# EAGLE board Broot (EAGLE 6.6.0)
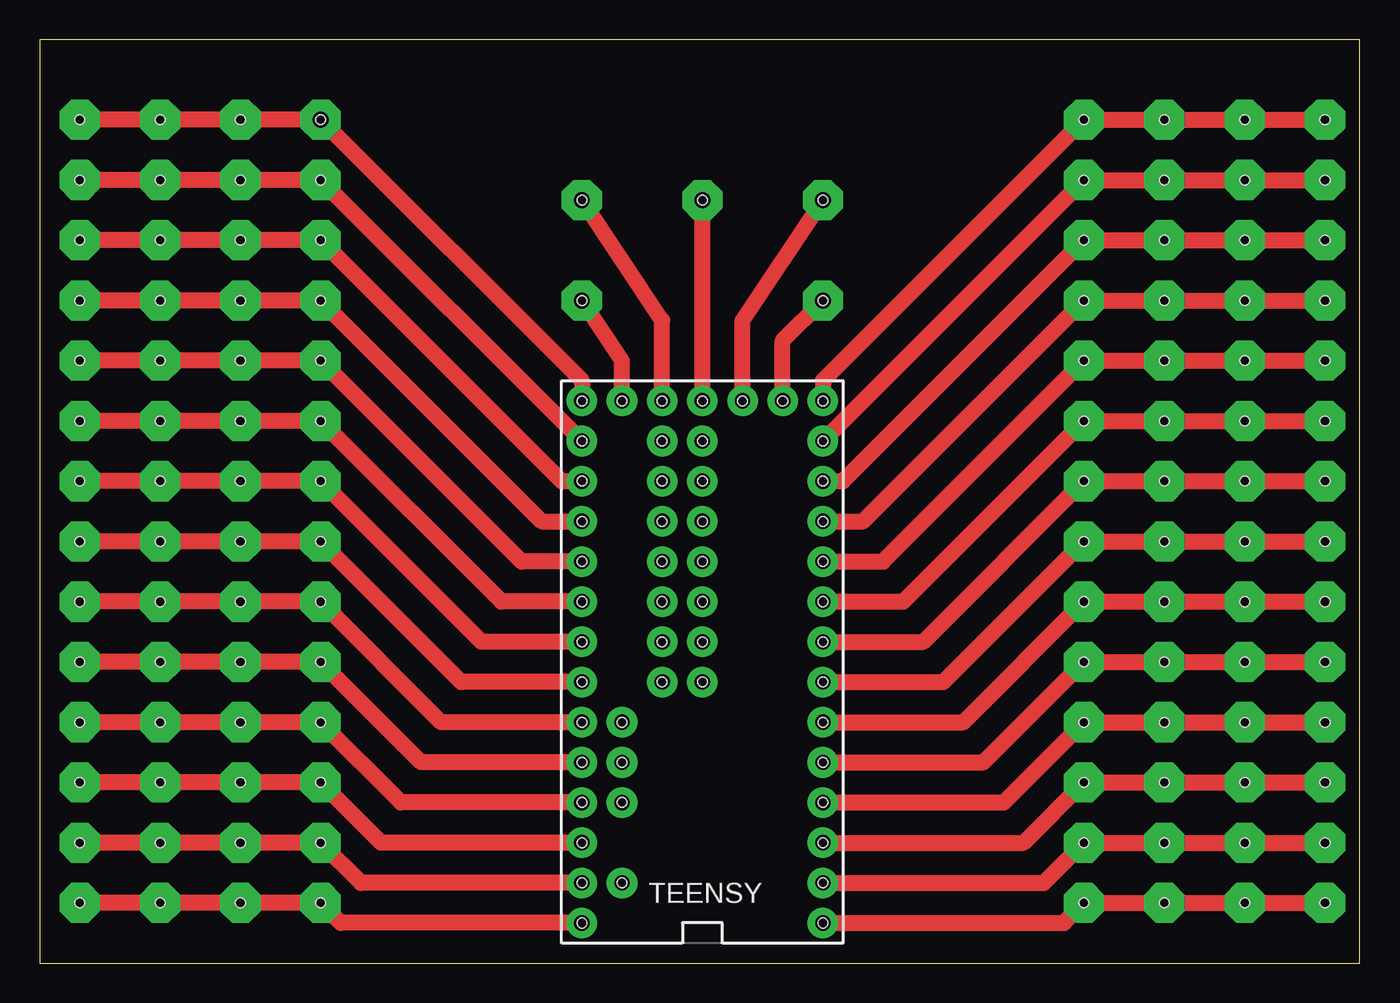
[diagram p0: board, top side]

Size 83.49 x 58.41 mm. Coordinates in mm from the lower left corner, seen from the top.
Outline: 0,0 83.49,0 83.49,58.41 0,58.41 0,0
Copper layers (1*16): Top 0.035mm / dielectric 1.5mm / Bottom 0.035mm
Design rules "default": minimum track width 10mil, minimum drill 24mil, track to track 8mil, track to pad 8mil, pad to pad 8mil, via to via 8mil, smd to smd 8mil, copper to edge 40mil, drill to drill 8mil, minimum pad ring 10mil, minimum via ring 8mil, stop-mask expansion 4mil, vias tented up to drill 0mil, thermal gap 10mil
Holes 0.6 mm at 17.78,53.34 34.29,35.56 34.29,33.02 34.29,30.48 34.29,27.94 34.29,25.4 34.29,22.86 34.29,20.32 34.29,17.78 34.29,15.24 34.29,12.7 34.29,10.16 34.29,7.62 34.29,5.08 34.29,2.54 36.83,5.08 36.83,10.16 36.83,12.7 36.83,15.24 39.37,17.78 41.91,17.78 41.91,20.32 39.37,20.32 39.37,22.86 41.91,22.86 41.91,25.4 39.37,25.4 39.37,27.94 41.91,27.94 41.91,30.48 39.37,30.48 39.37,33.02 41.91,33.02 41.91,35.56 39.37,35.56 36.83,35.56 44.45,35.56 46.99,35.56 49.53,35.56 49.53,33.02 49.53,30.48 49.53,27.94 49.53,25.4 49.53,22.86 49.53,20.32 49.53,17.78 49.53,15.24 49.53,12.7 49.53,10.16 49.53,7.62 49.53,5.08 49.53,2.54 41.91,48.26 34.29,48.26 34.29,41.91 49.53,48.26 49.53,41.91 17.78,49.53 17.78,45.72 17.78,41.91 17.78,38.1 17.78,34.29 17.78,30.48 17.78,26.67 17.78,22.86 17.78,19.05 17.78,15.24 17.78,11.43 17.78,3.81 17.78,7.62 66.04,3.81 66.04,7.62 66.04,11.43 66.04,15.24 66.04,19.05 66.04,22.86 66.04,26.67 66.04,30.48 66.04,34.29 66.04,38.1 66.04,41.91 66.04,53.34 66.04,49.53 66.04,45.72 2.54,53.34 2.54,49.53 2.54,45.72 7.62,45.72 12.7,45.72 12.7,49.53 7.62,49.53 7.62,53.34 12.7,53.34 12.7,41.91 7.62,41.91 2.54,41.91 2.54,38.1 7.62,38.1 12.7,38.1 2.54,34.29 7.62,34.29 7.62,30.48 12.7,30.48 12.7,34.29 2.54,30.48 2.54,26.67 2.54,22.86 7.62,22.86 7.62,26.67 12.7,26.67 12.7,22.86 12.7,19.05 12.7,15.24 12.7,11.43 12.7,7.62 12.7,3.81 7.62,3.81 2.54,3.81 2.54,7.62 2.54,11.43 2.54,15.24 2.54,19.05 7.62,19.05 7.62,15.24 7.62,11.43 7.62,7.62 71.12,53.34 71.12,49.53 71.12,45.72 76.2,45.72 81.28,45.72 81.28,49.53 76.2,49.53 76.2,53.34 81.28,53.34 81.28,41.91 76.2,41.91 71.12,41.91 71.12,38.1 76.2,38.1 81.28,38.1 71.12,34.29 76.2,34.29 76.2,30.48 81.28,30.48 81.28,34.29 71.12,30.48 71.12,26.67 71.12,22.86 76.2,22.86 76.2,26.67 81.28,26.67 81.28,22.86 81.28,19.05 81.28,15.24 81.28,11.43 81.28,7.62 81.28,3.81 76.2,3.81 71.12,3.81 71.12,7.62 71.12,11.43 71.12,15.24 71.12,19.05 76.2,19.05 76.2,15.24 76.2,11.43 76.2,7.62

## Footprints (pad centres in the part's own frame; a part is rotated, then mirrored left to right if it is on the bottom)
TEENSY_3.0_ALLPINS = drill 0.965 pad 1.93: 0 -7.62,13.97; 1 -7.62,11.43; 2 -7.62,8.89; 3 -7.62,6.35; 3.3V 7.62,11.43; 3.3V1 -2.54,-16.51; 3.3V2 2.54,-1.27; 4 -7.62,3.81; 5 -7.62,1.27; 6 -7.62,-1.27; 7 -7.62,-3.81; 8 -7.62,-6.35; 9 -7.62,-8.89; 10 -7.62,-11.43; 11 -7.62,-13.97; 12 -7.62,-16.51; 13 7.62,-16.51; 14/A0 7.62,-13.97; 15/A1 7.62,-11.43; 16/A2 7.62,-8.89; 17/A3 7.62,-6.35; 18/A4 7.62,-3.81; 19/A5 7.62,-1.27; 20/A6 7.62,1.27; 21/A7 7.62,3.81; 22/A8 7.62,6.35; 23/A9 7.62,8.89; 24 0,-3.81; 25 0,-6.35; 26 0,-8.89; 27 0,-11.43; 28 0,-13.97; 29 2.54,-13.97; 30 2.54,-11.43; 31 2.54,-8.89; 32 2.54,-6.35; 33 2.54,-3.81; A10 5.08,6.35; A11 5.08,3.81; A12 0,1.27; A13 2.54,1.27; AGND 7.62,13.97; AREF 5.08,8.89; GND -7.62,16.51; GND1 0,-16.51; GND2 0,-1.27; PGM 2.54,-16.51; RESET 5.08,-16.51; VBAT -5.08,-16.51; VIN 7.62,16.51; VUSB 5.08,13.97

## Placement (x,y rotation side)
TEENSY  [TEENSY_3.0_ALLPINS]  41.91,19.05 180 top

## Library data of the parts
TEENSY = Teensy3.0.b

## Nets
S$1: TEENSY.13
S$3: TEENSY.15/A1
S$4: TEENSY.16/A2
S$13: TEENSY.12
S$15: TEENSY.10
S$16: TEENSY.9

## Tracks (layer width: path | path; a pad name or v marks a point on that pad's centre or on a via)
3.3V  (via drill 0.6 pad 2.54)
  Top 1.016: 34.29,7.62 21.59,7.62 v17.78,11.43 v2.54,11.43
AGND  (via drill 0.6 pad 2.54)
  Top 1.016: 34.29,5.08 20.32,5.08 v17.78,7.62 v2.54,7.62
GND  (via drill 0.6 pad 2.54)
  Top 1.016: 49.53,2.54 64.77,2.54 v66.04,3.81 v71.12,3.81 v76.2,3.81 v81.28,3.81
S$1  (via drill 0.6 pad 2.54, 1 pad 2.54)
  Top 1.016: TEENSY.13 34.29,36.83 v17.78,53.34 v2.54,53.34
S$2  (via drill 0.6 pad 2.54)
  Top 1.016: 34.29,33.02 v17.78,49.53 v2.54,49.53
S$3  (via drill 0.6 pad 2.54)
  Top 1.016: TEENSY.15/A1 33.02,30.48 v17.78,45.72 v2.54,45.72
S$4  (via drill 0.6 pad 2.54)
  Top 1.016: TEENSY.16/A2 31.75,27.94 v17.78,41.91 v2.54,41.91
S$5  (via drill 0.6 pad 2.54)
  Top 1.016: 34.29,25.4 30.48,25.4 v17.78,38.1 v2.54,38.1
S$6  (via drill 0.6 pad 2.54)
  Top 1.016: 34.29,22.86 29.21,22.86 v17.78,34.29 v2.54,34.29
S$7  (via drill 0.6 pad 2.54)
  Top 1.016: 34.29,20.32 27.94,20.32 v17.78,30.48 v2.54,30.48
S$9  (via drill 0.6 pad 2.54)
  Top 1.016: 34.29,15.24 25.4,15.24 v17.78,22.86 v2.54,22.86
S$10  (via drill 0.6 pad 2.54)
  Top 1.016: 34.29,12.7 24.13,12.7 v17.78,19.05 v2.54,19.05
S$11  (via drill 0.6 pad 2.54)
  Top 1.016: 34.29,10.16 22.86,10.16 v17.78,15.24 v2.54,15.24
S$12  (via drill 0.6 pad 2.54)
  Top 1.016: 34.29,17.78 26.67,17.78 v17.78,26.67 v2.54,26.67
S$13  (via drill 0.6 pad 2.54)
  Top 1.016: TEENSY.12 49.53,36.83 v66.04,53.34 v71.12,53.34 v76.2,53.34 v81.28,53.34
S$14  (via drill 0.6 pad 2.54)
  Top 1.016: 49.53,33.02 v66.04,49.53 v71.12,49.53 v76.2,49.53 v81.28,49.53
S$15  (via drill 0.6 pad 2.54)
  Top 1.016: TEENSY.10 50.8,30.48 v66.04,45.72 v71.12,45.72 v76.2,45.72 v81.28,45.72
S$16  (via drill 0.6 pad 2.54)
  Top 1.016: TEENSY.9 52.07,27.94 v66.04,41.91 v71.12,41.91 v76.2,41.91 v81.28,41.91
S$17  (via drill 0.6 pad 2.54)
  Top 1.016: 49.53,25.4 53.34,25.4 v66.04,38.1 v71.12,38.1 v76.2,38.1 v81.28,38.1
S$18  (via drill 0.6 pad 2.54)
  Top 1.016: 49.53,22.86 54.61,22.86 v66.04,34.29 v71.12,34.29 v76.2,34.29 v81.28,34.29
S$19  (via drill 0.6 pad 2.54)
  Top 1.016: 49.53,20.32 55.88,20.32 v66.04,30.48 v71.12,30.48 v76.2,30.48 v81.28,30.48
S$20  (via drill 0.6 pad 2.54)
  Top 1.016: 49.53,17.78 57.15,17.78 v66.04,26.67 v71.12,26.67 v76.2,26.67 v81.28,26.67
S$21  (via drill 0.6 pad 2.54)
  Top 1.016: 49.53,15.24 58.42,15.24 v66.04,22.86 v71.12,22.86 v76.2,22.86 v81.28,22.86
S$22  (via drill 0.6 pad 2.54)
  Top 1.016: 49.53,12.7 59.69,12.7 v66.04,19.05 v71.12,19.05 v76.2,19.05 v81.28,19.05
S$23  (via drill 0.6 pad 2.54)
  Top 1.016: 49.53,10.16 60.96,10.16 v66.04,15.24 v71.12,15.24 v76.2,15.24 v81.28,15.24
S$24  (via drill 0.6 pad 2.54)
  Top 1.016: 49.53,7.62 62.23,7.62 v66.04,11.43 v71.12,11.43 v76.2,11.43 v81.28,11.43
S$25  (via drill 0.6 pad 2.54)
  Top 1.016: 49.53,5.08 63.5,5.08 v66.04,7.62 v71.12,7.62 v76.2,7.62 v81.28,7.62
S$26  (via drill 1 pad 2.54)
  Top 1.016: 36.83,35.56 36.83,38.1 v34.29,41.91
S$27  (via drill 1 pad 2.54)
  Top 1.016: 39.37,35.56 39.37,40.64 v34.29,48.26
S$28  (via drill 1 pad 2.54)
  Top 1.016: 41.91,35.56 v41.91,48.26
S$29  (via drill 1 pad 2.54)
  Top 1.016: 44.45,35.56 44.45,40.64 v49.53,48.26
S$30  (via drill 0.6 pad 2.54)
  other vias: 12.7,34.29
S$31  (via drill 0.6 pad 2.54)
  other vias: 12.7,38.1
S$32  (via drill 0.6 pad 2.54)
  other vias: 7.62,38.1
S$35  (via drill 0.6 pad 2.54)
  other vias: 7.62,41.91
S$36  (via drill 0.6 pad 2.54)
  other vias: 7.62,45.72
S$39  (via drill 0.6 pad 2.54)
  other vias: 7.62,49.53
S$49  (via drill 0.6 pad 2.54)
  other vias: 7.62,53.34
S$51  (via drill 0.6 pad 2.54)
  other vias: 12.7,53.34
S$52  (via drill 0.6 pad 2.54)
  other vias: 12.7,49.53
S$53  (via drill 0.6 pad 2.54)
  other vias: 12.7,30.48
S$54  (via drill 0.6 pad 2.54)
  other vias: 12.7,26.67
S$55  (via drill 0.6 pad 2.54)
  other vias: 12.7,22.86
S$56  (via drill 0.6 pad 2.54)
  other vias: 12.7,19.05
S$57  (via drill 0.6 pad 2.54)
  other vias: 12.7,15.24
S$58  (via drill 0.6 pad 2.54)
  other vias: 12.7,11.43
S$59  (via drill 0.6 pad 2.54)
  other vias: 12.7,7.62
S$60  (via drill 0.6 pad 2.54)
  other vias: 12.7,3.81
S$61  (via drill 0.6 pad 2.54)
  other vias: 7.62,3.81
S$62  (via drill 0.6 pad 2.54)
  other vias: 7.62,7.62
S$63  (via drill 0.6 pad 2.54)
  other vias: 7.62,11.43
S$64  (via drill 0.6 pad 2.54)
  other vias: 7.62,15.24
S$65  (via drill 0.6 pad 2.54)
  other vias: 7.62,19.05
S$66  (via drill 0.6 pad 2.54)
  other vias: 7.62,22.86
S$67  (via drill 0.6 pad 2.54)
  other vias: 7.62,26.67
S$68  (via drill 0.6 pad 2.54)
  other vias: 7.62,30.48
S$69  (via drill 0.6 pad 2.54)
  other vias: 7.62,34.29
S$70  (via drill 0.6 pad 2.54)
  other vias: 12.7,45.72
S$71  (via drill 0.6 pad 2.54)
  other vias: 12.7,41.91
VBAT  (via drill 1 pad 2.54)
  Top 1.016: 46.99,35.56 46.99,39.37 v49.53,41.91
VIN  (via drill 0.6 pad 2.54)
  Top 1.016: 34.29,2.54 19.05,2.54 v17.78,3.81 v2.54,3.81